# Allegro board AVRUSB500.brd
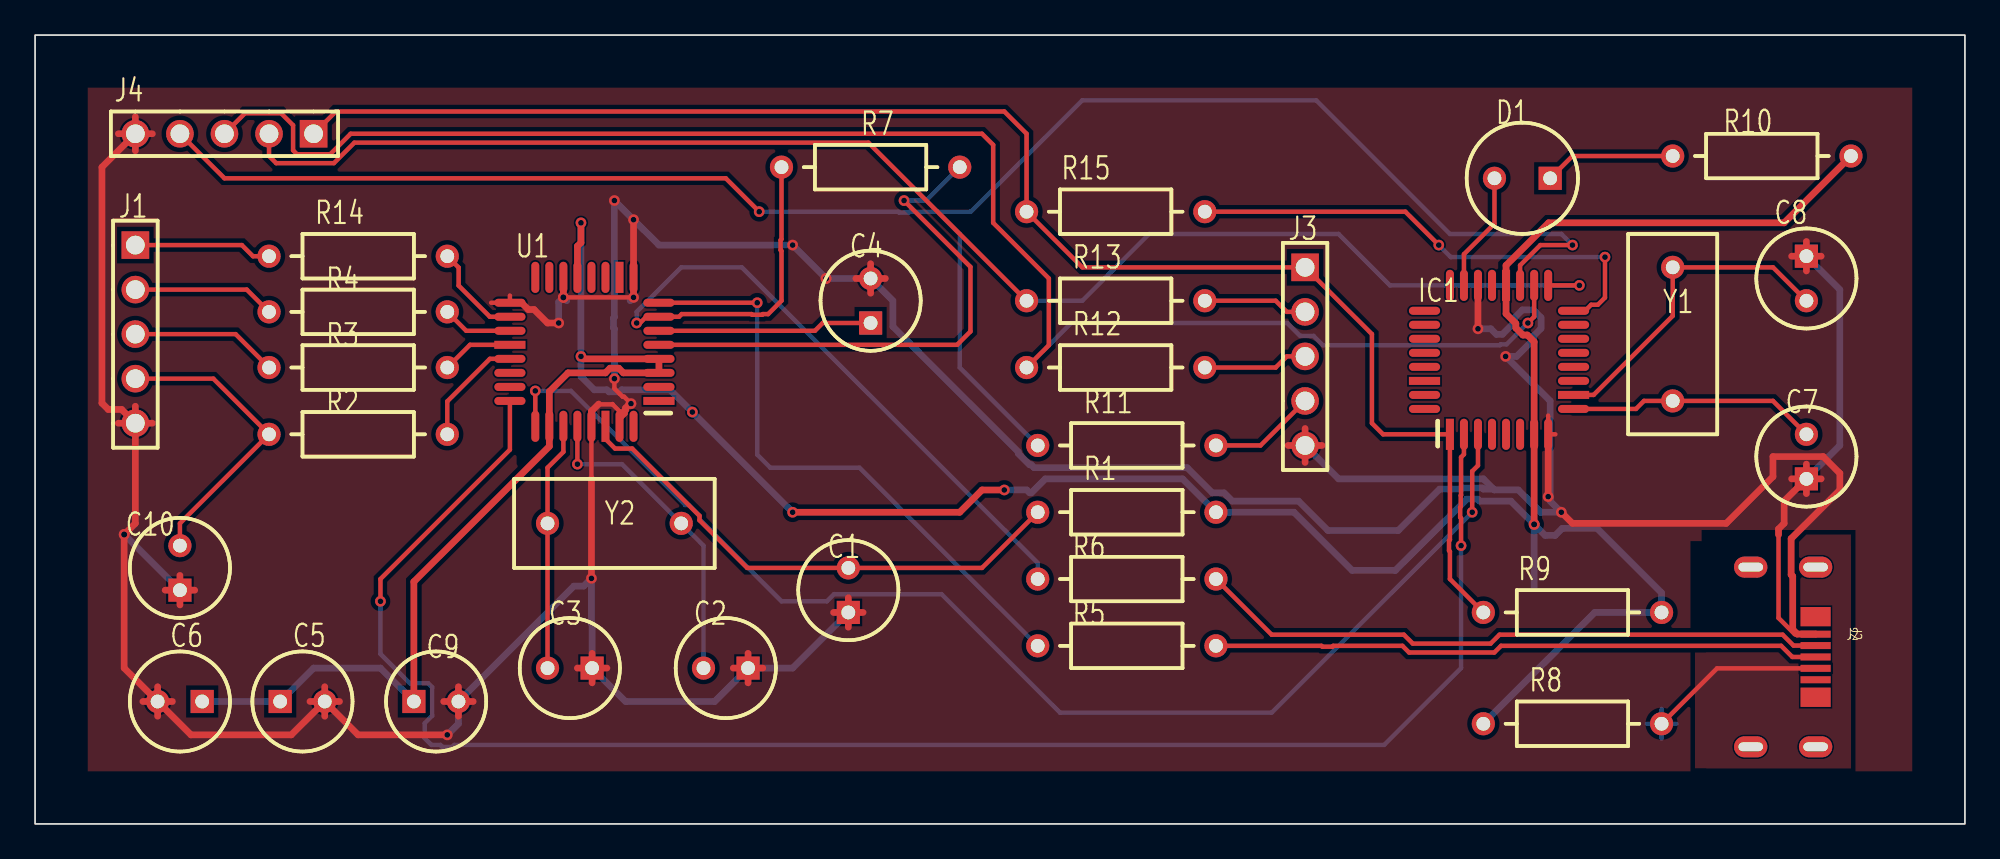
[diagram p0: board, top side]
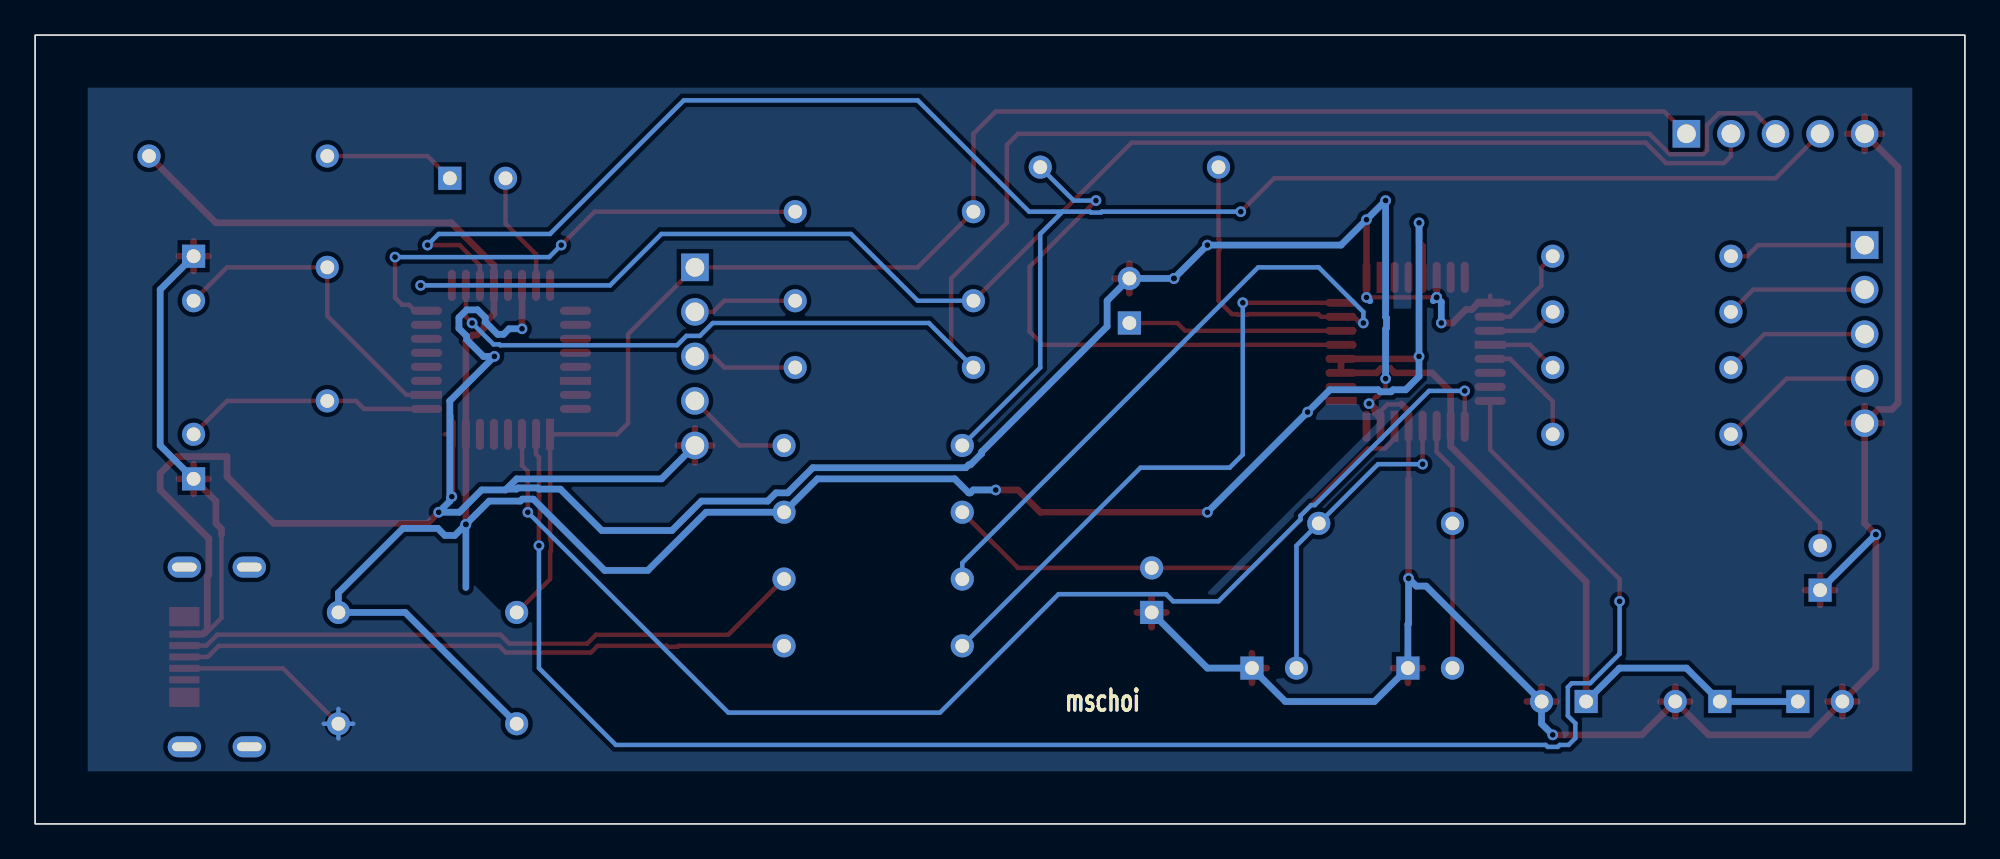
[diagram p1: board, bottom side, seen from below]

Outline 110 x 45 mm; copper layers: TOP, BOTTOM. Coordinates in mm from the lower left corner of the outline.
Outline path: rectangle 0,0 110,45

## Design rules (mm)
net group POWERNETS: nets VCC

## Placement (name value [footprint] x y rotation side)
C1  47nF  [CPCYL1D225LS100031]  46.35 12.06 90 top
C2  27pF  [CPCYL1D225LS100031]  40.64 8.89 180 top
C3  27pF  [CPCYL1D225LS100031]  31.75 8.89 180 top
C4  47nF  [CPCYL1D225LS100031]  47.62 28.57 90 top
C5  100nF  [CPCYL1D225LS100031]  13.97 6.99 0 top
C6  1uF  [CPCYL1D225LS100031]  9.53 6.99 180 top
C7  100nF  [CPCYL1D225LS100031]  100.97 19.68 90 top
C8  100nF  [CPCYL1D225LS100031]  100.97 32.38 270 top
C9  100nF  [CPCYL1D225LS100031]  21.59 6.99 0 top
C10  22nF  [CPCYL1D225LS100031]  8.26 13.34 90 top
D1  LED  [CYLD250LS125031]  86.36 36.83 180 top
IC1  ATmega8  [QUAD80M32WG900]  80.64 22.23 0 top
J1  bbpg_Bitbang  [BLKCON100VHTM1SQSW1005]  5.71 33.02 270 top
J2  USBA  [USB_MICRO]  97.79 9.53 270 top
J3  avrusb500_out  [BLKCON100VHTM1SQSW1005]  72.39 31.75 270 top
J4  firmware_in  [BLKCON100VHTM1SQSW1005]  15.88 39.37 180 top
NOREF  -  []  0 45 0 top
NOREF#2  -  []  110 0 90 top
R1  470  [AX400X100031]  57.15 17.78 0 top
R2  220  [AX400X100031]  23.5 22.23 180 top
R3  220  [AX400X100031]  23.5 26.04 180 top
R4  220  [AX400X100031]  23.5 29.21 180 top
R5  27  [AX400X100031]  67.31 10.16 180 top
R6  27  [AX400X100031]  67.31 13.97 180 top
R7  1.5k  [AX400X100031]  42.55 37.47 0 top
R8  2.2  [AX400X100031]  92.71 5.71 180 top
R9  10k  [AX400X100031]  92.71 12.06 180 top
R10  470  [AX400X100031]  93.34 38.1 0 top
R11  1k  [AX400X100031]  57.15 21.59 0 top
R12  220  [AX400X100031]  56.52 26.04 0 top
R13  1k  [AX400X100031]  56.52 29.84 0 top
R14  220  [AX400X100031]  23.5 32.38 180 top
R15  220  [AX400X100031]  66.67 34.92 180 top
U1  FT232BM  [QUAD80M32WG900]  35.56 24.13 90 top
Y1  3.6864Mhz  [RAD450X200LS300031]  93.34 31.75 270 top
Y2  6Mhz  [RAD450X200LS300031]  36.83 17.14 180 top

## Library data of the parts
C1-C5 C7-C10 = CAPACITOR NON-POL: alternate symbols: (SMDCAP)
C6 = CAPACITOR POL: alternate symbols: (SMDCAP)
D1 = LED
IC1 = ATmega8-DIL28_1
J1 J3 J4 = CON5
J2 = CON4_7
R1-R15 = R: alternate symbols: (SMDRES)
U1 = FT232BM_2: alternate symbols: (JEDECMS026)
Y1 Y2 = ZTA

## Footprints (pads in the part's own frame, mm; a bottom-side part is the same pattern mirrored in y, then rotated)
AX400X100031
  round 1.321 hole 0.787: 1(0,0) 2(10.16,0)
BLKCON100VHTM1SQSW1005
  rect 1.575x1.575 hole 1.067: 1(0,0)
  round 1.575 hole 1.067: 2(2.54,0) 3(5.08,0) 4(7.62,0) 5(10.16,0)
CPCYL1D225LS100031
  rect 1.321x1.321 hole 0.787: 1(0,0)
  round 1.321 hole 0.787: 2(2.54,0)
CYLD250LS125031
  rect 1.321x1.321 hole 0.787: 1(0,0)
  round 1.321 hole 0.787: 2(3.175,0)
QUAD80M32WG900
  rect 0.457x1.778 smd: 1(0,0) 20(3.2,8.496)
  oval 0.457x1.778 smd: 2(0.8,0) 3(1.6,0) 4(2.4,0) 5(3.2,0) 6(4,0) 7(4.801,0) 8(5.601,0) 17(5.601,8.496) 18(4.801,8.496) 19(4,8.496) 21(2.4,8.496) 22(1.6,8.496) 23(0.8,8.496) 24(0,8.496)
  oval 1.778x0.457 smd: 9(7.048,1.448) 11(7.048,3.048) 12(7.048,3.848) 13(7.048,4.648) 14(7.048,5.448) 15(7.048,6.248) 16(7.048,7.048) 25(-1.448,7.048) 26(-1.448,6.248) 27(-1.448,5.448) 28(-1.448,4.648) 29(-1.448,3.848) 31(-1.448,2.248) 32(-1.448,1.448)
  rect 1.778x0.457 smd: 10(7.048,2.248) 30(-1.448,3.048)
RAD450X200LS300031
  round 1.321 hole 0.787: 1(0,0) 2(7.62,0)
USB_MICRO
  oval 1.2x1.9 hole 0.5x1.4: (-5.125,3.7) (-5.125,0) (5.125,3.7) (5.125,0)
  rect 1.1x1.72 smd: (-2.3,3.7) (2.3,3.7)
  rect 0.4x1.72 smd: 1(-1.3,3.7) 2(-0.65,3.7) 3(0,3.7) 4(0.65,3.7) 5(1.3,3.7)

## Nets
+5V: J2.4 R8.1
GND: C1.1 C2.1 C3.1 C4.2 C5.2 C6.2 C7.1 C8.1 C9.2 C10.1 IC1.8(GND) IC1.22(AGND) J1.5 J2.1 J3.5 J4.5 U1.9(GND) U1.14(PWRCTL) U1.17(GND1) U1.29(AGND) U1.31(TEST)
VCC: C5.1 C6.1 C9.1 IC1.7(VCC) IC1.20(AVCC) R1.2 R8.2 R9.1 R10.2 U1.3(VCC) U1.4(RESET#) U1.13(VCC-IO) U1.26(VCC1)
BMISO: J1.3 R3.2
BMOSI: J1.2 R4.2
BRESET: J1.1 R14.2
BSCK: C10.2 J1.4 R2.2
D+: J2.2 R6.1
D-: J2.3 R5.1
F_MISO: IC1.18((MISO) PB4) J4.3 R12.1
F_MOSI: IC1.17((OC2/MOSI) PB3) J4.2 R13.1
F_SCK: IC1.19((SCK) PB5) J4.4 R11.1
MISO: J3.3 R12.2
MOSI: J3.2 R13.2
RESET: IC1.1(PC6 (R\E\S\E\T\)) J3.1 J4.1 R9.2 R15.2
RXD: IC1.2(PD0 (RXD)) U1.24(RXD)
SCK: J3.4 R11.2
TXD: IC1.3(PD1 (TXD)) U1.25(TXD)
N02483: R6.2 R7.1 U1.7(USBDP)
N02615: R5.2 U1.8(USBDM)
N03527: C4.1 U1.6(3V3OUT)
N06839: R2.1 U1.21(DTR#)
N06967: R3.1 U1.20(DSR#)
N07033: R4.1 U1.19(DCD#)
N07247: R14.1 U1.18(RI#)
N11951: R7.2 U1.5(RSTOUT#)
N15182: C7.2 IC1.9(PB6 (XT1/TOSC1)) Y1.2
N15289: C8.2 IC1.10(PB7 (XT2/TOSC2)) Y1.1
N19734: D1.2(CATHODE) IC1.23((ADC0) PC0)
N20572: D1.1(ANODE) R10.1
N22544: IC1.16((SS/OC1B) PB2) R15.1
N41098: C3.2 U1.27(XTIN) Y2.2
N41106: C2.2 U1.28(XTOUT) Y2.1
N49165: C1.2 R1.1 U1.30(AVCC)

Pads without a net: IC1 4 5 6 11 12 13 14 15 21 24 25 26 27 28 29 30 31 32; J2 5; U1 1 2 10 11 12 15 16 22 23 32

## Via types
v1: diameter 0.61, hole 0.33, TOP to BOTTOM, 40 vias

## Routing (per net, layer and track width the routed paths; a pad name or vN(x,y) marks a point on that pad's centre or on a via; arc(x,y) is an arc through that point)
+5V: length 13.5
  TOP w0.254: R8.1 95.87,8.88 J2.4
  BOTTOM w0.254: R8.1 93.55,5.71 ; R8.1 92.71,4.87 ; R8.1 92.71,6.56 ; R8.1 91.87,5.71
GND: length 338
  TOP w0.254: 101.49,10.82 100.3,10.82 99.38,11.75 99.38,16.5 ; 86.25,23.29 IC1.8 86.66,22.23 ; 26,29.73 27.06,29.73 27.06,30.14 ; v1(33.02,25.4) 33.02,24.84 33.49,24.37 33.57,24.37 v1(33.97,23.98) ; 32.92,23.93 33.31,23.54 33.31,23.15 ; 32.92,23.93 32.14,23.93 32.12,23.95 ; 32.92,23.93 32.9,23.95 ; v1(34.11,30.04) v1(30.11,30.04) ; 31.71,19.7 U1.29
  TOP w0.381: 100.97,31.54 C8.1 ; C8.1 100.97,33.23 ; C8.1 100.12,32.38 ; C8.1 101.81,32.38 ; J1.5 5.71,23.83 ; J1.5 4.93,23.64 4.17,23.64 3.81,24 3.81,37.47 J4.5 ; J1.5 4.75,22.86 ; J1.5 5.71,17.14 v1(5.08,16.51) 5.08,8.89 C6.2 ; J1.5 6.68,22.86 ; 100.12,19.68 C7.1 ; C7.1 100.97,20.53 ; C7.1 101.81,19.68 ; C7.1 99.69,18.41 99.69,17.14 99.38,16.83 99.38,16.5 ; C7.1 100.97,18.84 ; C9.2 24.13,7.83 ; C9.2 24.97,6.99 ; C9.2 24.13,6.14 ; C9.2 23.29,6.99 ; 8.26,12.49 C10.1 ; C10.1 7.41,13.34 ; C10.1 9.1,13.34 ; C10.1 8.26,14.18 ; 16.51,6.14 C5.2 ; C5.2 18.41,5.08 v1(23.5,5.08) ; C5.2 14.61,5.08 8.89,5.08 C6.2 ; C5.2 15.67,6.99 ; C5.2 17.35,6.99 ; C5.2 16.51,7.83 ; C2.1 40.64,9.73 ; C2.1 41.48,8.89 ; C2.1 39.8,8.89 ; C2.1 40.64,8.05 ; 47.62,30.27 C4.2 ; C4.2 48.47,31.11 ; C4.2 46.78,31.11 ; C4.2 47.62,31.96 ; C6.2 6.14,6.99 ; C6.2 6.99,6.14 ; C6.2 6.99,7.83 ; C6.2 7.83,6.99 ; C1.1 47.2,12.06 ; C1.1 46.35,11.22 ; C1.1 46.35,12.91 ; C1.1 45.51,12.06 ; 72.39,20.62 J3.5 ; J3.5 73.36,21.59 ; J3.5 71.42,21.59 ; J3.5 72.39,22.56 ; 4.75,39.37 J4.5 ; J4.5 5.71,40.34 ; J4.5 6.68,39.37 ; J4.5 5.71,38.4 ; v1(31.71,14.01) 31.71,19.7 ; C3.1 32.59,8.89 ; C3.1 30.91,8.89 ; C3.1 31.75,8.05 ; C3.1 31.75,9.73
  TOP w0.382: 32.12,23.95 31.71,23.54 U1.29 ; v1(87,17.78) 87.63,17.14 96.4,17.14 99.06,19.81 99.06,20.95 101.92,20.95 102.87,20 102.87,19.05 100.09,16.27 100.09,14.22 100.19,14.13 100.19,11.09 100.44,10.83 101.48,10.83 101.49,10.82 ; v1(33.97,23.98) 33.91,23.98 33.66,23.72 33.66,23.62 33.59,23.56 33.59,23.43 33.31,23.15 U1.31 ; v1(34.11,34.47) U1.9 v1(34.11,30.04) ; 82.25,30.72 v1(82.25,28.25) ; v1(29.84,28.57) 29.21,28.57 28.44,29.34 28.11,29.34 27.72,29.73 27.06,29.73 ; v1(86.25,18.67) IC1.8 ; U1.14 v1(30.11,30.04)
  BOTTOM w0.381: 31.71,11.43 v1(31.71,14.01) 31.27,13.57 30.71,13.57 C9.2 24.13,5.71 v1(23.5,5.08) ; C8.1 102.87,30.48 102.87,21.59 C7.1
  BOTTOM w0.382: 83.14,19.1 82.56,19.1 82.49,19.17 81.34,19.17 81.27,19.1 80.06,19.1 77.7,16.74 73.7,16.74 72.02,18.42 68.24,18.42 67.77,18.89 67.1,18.89 65.67,20.32 56.95,20.32 56.78,20.48 56.69,20.48 56.04,21.13 56.04,21.22 48.9,28.37 48.9,29.84 C4.2 v1(45.09,31.11) v1(43.18,33.02) 35.56,33.02 v1(34.11,34.47) v1(33.02,35.56) 33.02,28.91 32.97,28.86 32.97,28.29 33.02,28.24 v1(33.02,25.4) ; 83.14,19.1 83.18,19.05 84.54,19.05 85.81,17.78 v1(87,17.78) 86.36,18.41 86.36,18.55 ; 83.14,19.1 82.55,19.68 74.3,19.68 J3.5 ; 33.92,29.84 v1(34.11,30.04) ; 86.36,18.55 86.36,24.13 v1(83.82,26.67) 84.44,26.67 85.4,27.63 85.4,27.82 85.84,28.26 85.84,28.89 85.4,29.32 84.78,29.32 84.34,28.89 84.34,28.63 83.63,27.93 83.3,27.93 82.98,28.25 v1(82.25,28.25) ; 86.36,18.55 v1(86.25,18.67) ; 31.71,11.43 31.75,11.39 C3.1 33.66,6.99 38.73,6.99 C2.1 43.18,8.89 C1.1 ; 30.3,29.84 v1(30.11,30.04) 29.84,29.77 v1(29.84,28.57) ; v1(5.08,16.51) C10.1
VCC: length 186.3
  TOP w0.381: v1(55.24,19.05) 53.98,19.05 52.7,17.78 v1(43.18,17.78)
  TOP w0.382: v1(31.11,34.29) 31.11,33.16 30.91,32.96 U1.13 ; C9.1 21.59,13.82 29.31,21.54 U1.26 29.31,24.66 30.38,25.73 32.51,25.73 32.77,26 33.27,26 33.53,25.73 U1.3 U1.4 31.25,26.53 v1(31.11,26.67) ; v1(85.45,17.09) IC1.7 85.45,27.5 85.06,27.89 84.81,27.89 84.4,28.29 84.4,28.54 83.84,29.1 83.84,31.86 86.27,34.29 99.69,34.29 R10.2
  BOTTOM w0.382: v1(85.45,17.09) 84.12,18.42 82.34,18.42 82.23,18.53 81.6,18.53 77.54,14.46 75.07,14.46 71.75,17.78 R1.2 65.41,19.68 57.58,19.68 56.78,18.89 56.69,18.89 56.53,19.05 v1(55.24,19.05) ; v1(85.45,17.09) 85.45,13.49 ; v1(85.45,17.09) 86.08,16.46 86.64,16.46 87.05,16.86 89.03,16.86 92.71,13.18 R9.1 88.9,12.06 R8.2 ; v1(31.11,34.29) v1(31.11,26.67) 31.11,25.52 31.87,24.77 32.59,24.77 32.71,24.65 33.33,24.65 33.45,24.77 36.2,24.77 v1(37.47,23.5) v1(43.18,17.78) ; C9.1 19.68,8.89 15.88,8.89 C5.1 C6.1
BMISO: length 8.4
  TOP w0.254: R3.2 11.43,27.94 J1.3
BMOSI: length 8.1
  TOP w0.254: R4.2 12.06,30.48 J1.2
BRESET: length 7.9
  TOP w0.254: R14.2 12.42,32.38 11.78,33.02 J1.1
BSCK: length 17.4
  TOP w0.254: C10.2 8.26,17.14 R2.2 10.16,25.4 J1.4
D+: length 36.2
  TOP w0.254: J2.2 100.23,10.18 99.61,10.79 83.47,10.79 82.96,10.29 78.53,10.29 78.02,10.79 70.48,10.79 R6.1
D-: length 34.8
  TOP w0.254: R5.1 73.32,10.16 73.38,10.11 73.94,10.11 74,10.16 77.94,10.16 78.32,9.78 83.17,9.78 83.56,10.16 99.53,10.16 100.16,9.53 J2.3
F_MISO: length 94.4
  TOP w0.254: R12.1 57.78,27.3 57.78,31.11 54.61,34.29 54.61,38.73 53.98,39.37 17.99,39.37 16.82,38.2 14.93,38.2 14.71,38.42 14.71,39.85 14.02,40.54 11.96,40.54 J4.3 ; 85.45,30.72 85.45,28.93 v1(85.09,28.57)
  BOTTOM w0.254: R12.1 59.05,28.57 71.37,28.57 72.11,27.84 72.87,27.84 73.41,27.3 83.48,27.3 83.53,27.36 83.87,27.36 v1(85.09,28.57)
F_MOSI: length 84.9
  TOP w0.254: R13.1 47.5,38.86 18.2,38.86 17.03,37.69 13.74,37.69 13.34,38.1 J4.2 ; 86.25,30.72 v1(88.02,30.72)
  BOTTOM w0.254: v1(88.02,30.72) 77.23,30.72 74.3,33.66 63.5,33.66 59.69,29.84 R13.1
F_SCK: length 107.6
  TOP w0.254: v1(87.63,33.02) 85.8,33.02 84.64,31.86 84.64,30.72 ; v1(41.27,34.92) 39.37,36.83 10.79,36.83 8.26,39.37
  BOTTOM w0.254: 51.44,34.92 53.34,34.92 59.69,41.27 73.03,41.27 80.64,33.66 87,33.66 v1(87.63,33.02) ; 51.44,34.92 52.7,33.66 52.7,26.04 R11.1 ; 51.44,34.92 49.87,34.92 49.81,34.87 49.24,34.87 49.19,34.92 v1(41.27,34.92)
MISO: length 6
  TOP w0.254: J3.3 71.35,26.67 70.71,26.04 R12.2
MOSI: length 6
  TOP w0.254: R13.2 70.71,29.84 71.35,29.21 J3.2
RESET: length 89.5
  TOP w0.254: 82.55,12.06 80.64,13.97 80.64,15.54 80.59,15.59 80.59,16.16 80.64,16.21 IC1.1 76.83,22.23 76.2,22.86 76.2,27.94 J3.1 59.69,31.75 R15.2 56.52,39.37 55.24,40.64 17.14,40.64 J4.1
RXD: length 98.9
  TOP w0.254: U1.24 27.06,21.35 19.68,13.97 v1(19.68,12.7) ; IC1.2 81.44,21.08 81.28,20.92 81.28,18.75 81.26,18.73 81.26,18.1 81.23,18.07 81.23,17.5 81.28,17.44 v1(81.28,15.88)
  BOTTOM w0.254: v1(81.28,15.88) 81.28,8.89 76.9,4.51 23.89,4.51 23.78,4.39 23.21,4.39 23.1,4.51 22.59,4.51 22.21,4.89 22.21,5.74 22.63,6.17 22.63,7.8 22.41,8.03 21.36,8.03 19.68,9.7 v1(19.68,12.7)
SCK: length 6.1
  TOP w0.254: J3.4 69.85,21.59 R11.2
TXD: length 72.8
  TOP w0.254: IC1.3 82.25,20.45 81.92,20.12 v1(81.92,17.78) ; U1.25 v1(28.51,24.7)
  BOTTOM w0.254: v1(28.51,24.7) 30.54,24.7 37.06,18.19 37.26,18.19 37.87,17.58 37.87,17.37 42.55,12.7 45.13,12.7 45.54,13.11 51.66,13.11 58.42,6.35 70.48,6.35 v1(81.92,17.78)
N02483: length 48.9
  TOP w0.254: v1(34.29,28.57) 34.48,28.57 34.84,28.93 36.7,28.93 36.85,29.08 40.84,29.08 40.88,29.05 41.45,29.05 41.48,29.08 41.78,29.08 42.55,29.84 42.55,32.68 42.49,32.73 42.49,33.3 42.55,33.36 R7.1
  BOTTOM w0.254: R6.2 57.15,14.89 40.29,31.75 36.83,31.75 34.29,29.21 v1(34.29,28.57)
N02615: length 34.8
  TOP w0.254: 35.56,29.73 v1(41.16,29.73)
  BOTTOM w0.254: R5.2 46.99,20.32 41.91,20.32 41.16,21.07 v1(41.16,29.73)
N03527: length 12.2
  TOP w0.254: U1.6 44.45,28.13 44.9,28.57 C4.1
N06839: length 6.5
  TOP w0.254: U1.21 25.92,26.53 23.5,24.1 R2.1
N06967: length 4.1
  TOP w0.254: U1.20 24.79,27.33 R3.1
N07033: length 4
  TOP w0.254: U1.19 24.57,28.13 R4.1
N07247: length 5.6
  TOP w0.254: 27.06,28.93 25.92,28.93 24.14,30.71 24.14,31.74 R14.1
N11951: length 31.1
  TOP w0.254: v1(49.53,35.56) 53.31,31.77 53.31,28.09 52.55,27.33 U1.5
  BOTTOM w0.254: R7.2 50.8,35.56 v1(49.53,35.56)
N15182: length 14.3
  TOP w0.254: C7.2 99.06,24.13 Y1.2 91.71,24.13 91.25,23.67 IC1.9
N15289: length 18.7
  TOP w0.254: 87.69,24.47 88.84,24.47 93.34,28.98 Y1.1 99.06,31.75 C8.2
N19734: length 6.8
  TOP w0.254: 81.44,30.72 81.44,32.5 83.19,34.24 D1.2
N20572: length 7.5
  TOP w0.254: D1.1 87.63,38.1 R10.1
N22544: length 28.3
  TOP w0.254: R15.1 78.11,34.92 v1(80.01,33.02) ; v1(89.48,32.33) 89.48,30.02 89.08,29.62 88.7,29.62 88.35,29.27 87.69,29.27
  BOTTOM w0.254: v1(80.01,33.02) 80.7,32.33 v1(89.48,32.33)
N41098: length 14.2
  TOP w0.254: U1.27 30.11,21.22 29.21,20.32 Y2.2 C3.2
N41106: length 18.3
  TOP w0.254: U1.28 v1(30.91,20.52)
  BOTTOM w0.254: C2.2 38.1,15.88 Y2.1 33.45,20.52 v1(30.91,20.52)
N49165: length 29.9
  TOP w0.254: R1.1 53.98,14.61 C1.2 40.59,14.61 37.87,17.32 37.87,17.58 34.04,21.41 33.06,21.41 32.51,21.96 U1.30

## Copper pours and planes (outline as drawn; the poured copper is in the pictures)
+5V on TOP: 94.61,15.88 94.61,3.17 103.5,3.17 103.5,15.88 ; 1 cut-out
+5V on TOP: 95.25,16.51 95.25,3.17 103.5,3.17 103.5,16.51 ; 1 cut-out
+5V on BOTTOM: 3,3 3,42 107,42 107,3 ; 7 cut-outs
GND on TOP: 3,3 3,42 107,42 107,3 ; 6 cut-outs

## Text on the board
Ref Des/Silkscreen Bottom: mschoi
DIMENSION: FIGURE | SIZE | 0.33 | 0.787 | 1.067 | 1.4x0.5 | DRILL CHART: TOP to BOTTOM | ALL UNITS ARE IN MILLIMETERS | PLATED | QTY | 40 | 56 | 15 | 4
